# EAGLE board G22V3 (EAGLE 9.6.2)
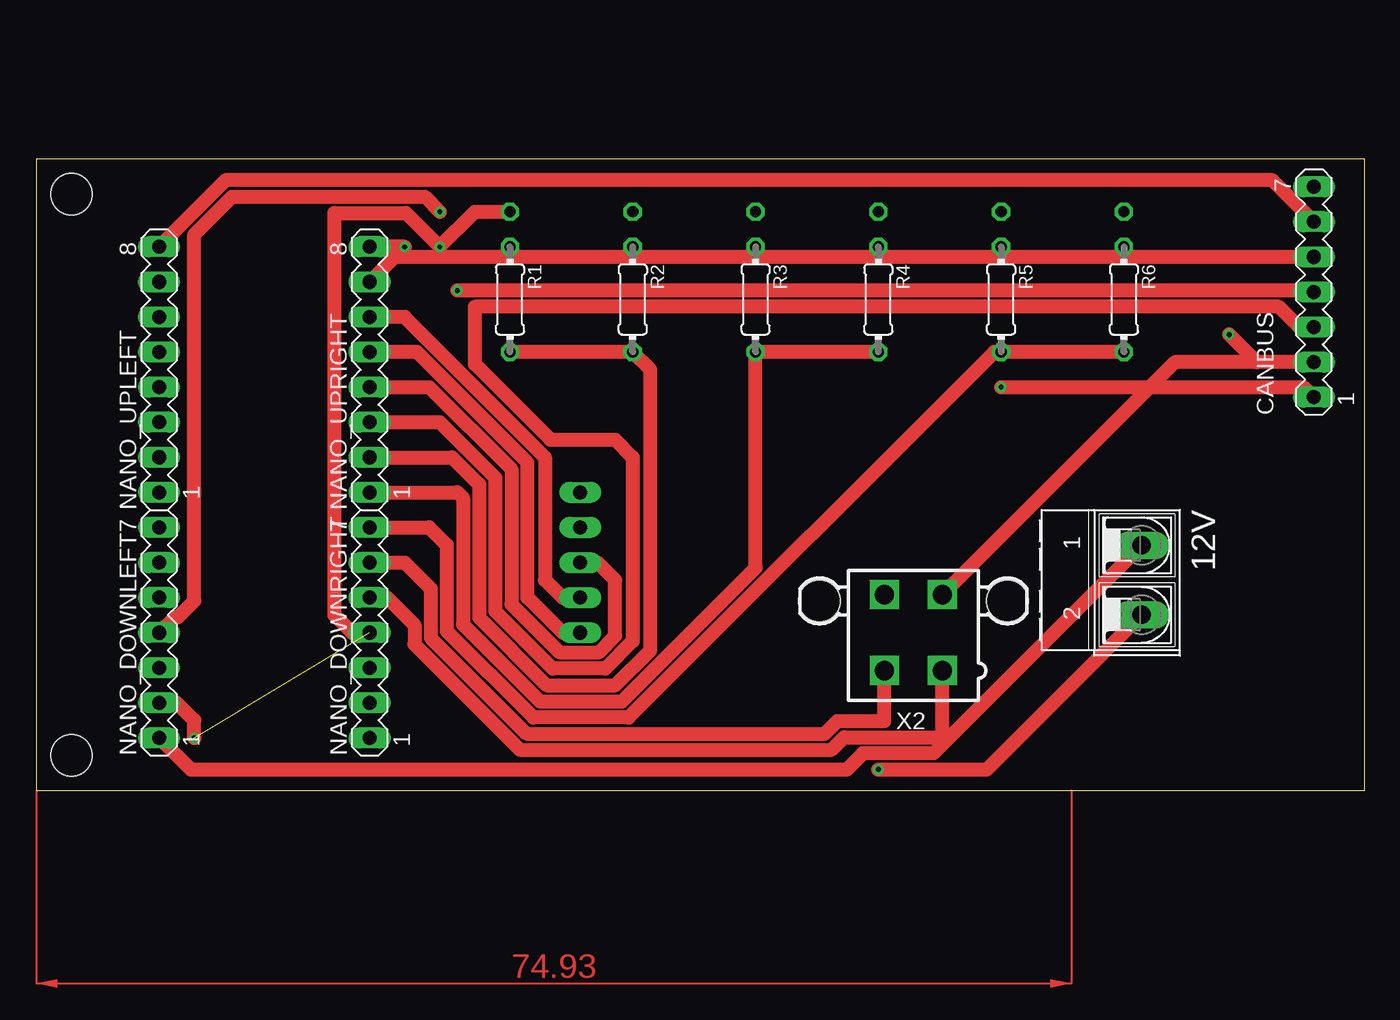
[diagram p0: board, top side]
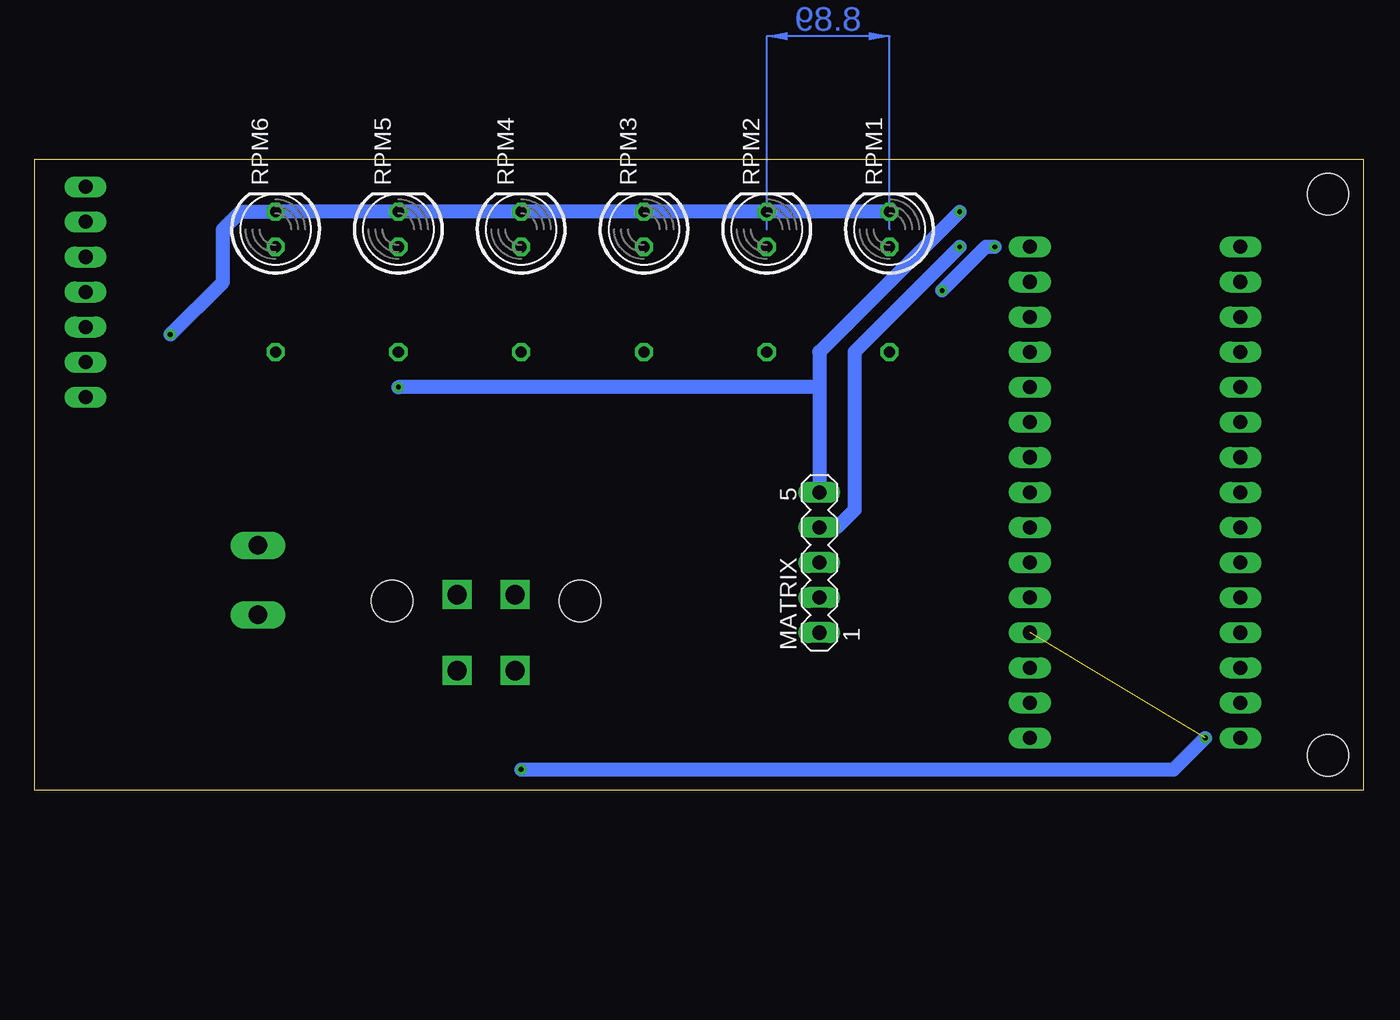
[diagram p1: board, bottom side, seen from below]

Size 96.19 x 45.71 mm. Coordinates in mm from the lower left corner, seen from the top.
Outline: 0,0 96.19,0 96.19,45.71 0,45.71 0,0
Copper layers (1*16): Top 0.035mm / dielectric 1.5mm / Bottom 0.035mm
Design rules "default": minimum track width 6mil, minimum drill 0.35mm, track to track 6mil, track to pad 6mil, pad to pad 6mil, via to via 6mil, smd to smd 6mil, copper to edge 40mil, drill to drill 6mil, minimum pad ring 10mil, minimum via ring 8mil, stop-mask expansion 4mil, vias tented up to drill 0mil, thermal gap 10mil
Holes 3 mm at 2.54,43.18 2.54,2.54 118.11,2.54 118.11,43.18

## Footprints (pad centres in the part's own frame; a part is rotated, then mirrored left to right if it is on the bottom)
AK500/2-H = drill 1.321 long: 1 -2.515,0; 2 2.515,0
MA07-1 = drill 1.016 long: 1 -7.62,0; 2 -5.08,0; 3 -2.54,0; 4 0,0; 5 2.54,0; 6 5.08,0; 7 7.62,0
MA05-1 = drill 1.016 long: 1 -5.08,0; 2 -2.54,0; 3 0,0; 4 2.54,0; 5 5.08,0
MA08-1 = drill 1.016 long: 1 -8.89,0; 2 -6.35,0; 3 -3.81,0; 4 -1.27,0; 5 1.27,0; 6 3.81,0; 7 6.35,0; 8 8.89,0
0204/7 = drill 0.813 octagon: 1 -3.81,0; 2 3.81,0
LED5MM = drill 0.813 octagon: A -1.27,0; K 1.27,0
5566-4 = drill 1.4 square: 1 2.1,-2.75; 2 -2.1,-2.75; 3 2.1,2.75; 4 -2.1,2.75 | hole 3: 6.8,2.29; -6.8,2.29

## Placement (x,y rotation side)
12V  [AK500/2-H]  80.01,15.24 270 top
CANBUS  [MA07-1]  92.49,36.1 90 top
MATRIX  [MA05-1]  39.37,16.51 90 bottom
NANO_DOWNLEFT  [MA07-1]  8.89,11.43 90 top
NANO_DOWNRIGHT  [MA07-1]  24.13,11.43 90 top
NANO_UPLEFT  [MA08-1]  8.89,30.48 90 top
NANO_UPRIGHT  [MA08-1]  24.13,30.48 90 top
R1  [0204/7]  34.29,35.56 270 top
R2  [0204/7]  43.18,35.56 270 top
R3  [0204/7]  52.07,35.56 270 top
R4  [0204/7]  60.96,35.56 270 top
R5  [0204/7]  69.85,35.56 270 top
R6  [0204/7]  78.74,35.56 270 top
RPM1  [LED5MM]  34.29,40.64 90 bottom
RPM2  [LED5MM]  43.18,40.64 90 bottom
RPM3  [LED5MM]  52.07,40.64 90 bottom
RPM4  [LED5MM]  60.96,40.64 90 bottom
RPM5  [LED5MM]  69.85,40.64 90 bottom
RPM6  [LED5MM]  78.74,40.64 90 bottom
X2  5566-4  [5566-4]  63.5,11.43 0 top

## Library data of the parts
12V = con-ptr500; OC_FARNELL: unknown; OC_NEWARK: unknown
CANBUS MATRIX NANO_DOWNLEFT NANO_DOWNRIGHT NANO_UPLEFT NANO_UPRIGHT = con-lstb; OC_FARNELL: unknown; OC_NEWARK: unknown
R1-R6 = rcl; SPICEPREFIX: R
RPM1-RPM6 = led
X2 = con-molex; MF: MOLEX; OC_FARNELL: unknown; OC_NEWARK: unknown

## Nets
A7: NANO_DOWNLEFT.5
CLK: MATRIX.1 NANO_UPRIGHT.5
CS_CAN: CANBUS.3 NANO_UPRIGHT.3
CS_MATRIX: MATRIX.2 NANO_UPRIGHT.6
D2: NANO_DOWNRIGHT.5 X2.1
D3: NANO_DOWNRIGHT.6 X2.2
D4: NANO_DOWNRIGHT.7 R5.2 R6.2
D5: NANO_UPRIGHT.1 R3.2 R4.2
D6: NANO_UPRIGHT.2 R1.2 R2.2
DIN: MATRIX.3 NANO_UPRIGHT.4
GND: 12V.2 CANBUS.2 MATRIX.4 NANO_DOWNLEFT.2 NANO_DOWNRIGHT.4 RPM1.K RPM2.K RPM3.K RPM4.K RPM5.K RPM6.K X2.3
MISO: CANBUS.4 NANO_UPRIGHT.8
MOSI: CANBUS.5 NANO_UPRIGHT.7
N$6: X2.4
N$13: NANO_DOWNRIGHT.3
N$14: NANO_DOWNRIGHT.2
N$15: NANO_DOWNRIGHT.1
N$17: NANO_UPLEFT.7
N$18: NANO_UPLEFT.6
N$19: NANO_UPLEFT.5
N$20: NANO_UPLEFT.4
N$21: NANO_UPLEFT.3
N$22: NANO_UPLEFT.2
N$23: NANO_UPLEFT.1
N$24: NANO_DOWNLEFT.7
N$25: NANO_DOWNLEFT.6
N$28: NANO_DOWNLEFT.3
N$29: R1.1 RPM1.A
N$30: R2.1 RPM2.A
N$31: R3.1 RPM3.A
N$32: R4.1 RPM4.A
N$33: R5.1 RPM5.A
N$34: R6.1 RPM6.A
SCK: CANBUS.6 NANO_UPLEFT.8
VCC: CANBUS.1 MATRIX.5 NANO_DOWNLEFT.4
VIN: 12V.1 NANO_DOWNLEFT.1

## Tracks (layer width: path | path; a pad name or v marks a point on that pad's centre or on a via)
CLK
  Top 1.016: 25.4,31.75 NANO_UPRIGHT.5 27.56,31.75 35.56,23.75 35.56,13.97 38.1,11.43 MATRIX.1
CS_CAN
  Top 1.016: NANO_UPRIGHT.3 29.21,26.67 33.22,22.66 33.22,13 37.39,8.84 41.2,8.84 43.18,10.81 43.18,24.13 41.91,25.4 37.21,25.4 31.75,30.86 31.75,35.03 89.95,35.03 91.42,33.56 CANBUS.3
CS_MATRIX
  Top 1.016: NANO_UPRIGHT.6 26.67,34.29 36.83,24.13 36.83,15.24 38.1,13.97 MATRIX.2
D2
  Top 1.016: NANO_DOWNRIGHT.5 25.4,13.97 27.38,11.99 27.38,10.58 35.02,2.95 57.56,2.95 58.47,3.86 65.6,3.86 X2.1
D3
  Top 1.016: NANO_DOWNRIGHT.6 26.67,16.51 28.55,14.63 28.55,11.07 35.5,4.12 57.07,4.12 57.99,5.03 61.4,5.03 X2.2
D4
  Top 1.016: R6.2 R5.2 69.34,31.75 42.88,5.28 35.98,5.28 29.72,11.55 29.72,17.78 28.45,19.05 NANO_DOWNRIGHT.7
D5
  Top 1.016: R4.2 R3.2 52.07,16.13 42.39,6.45 36.47,6.45 30.89,12.03 30.89,21.18 30.48,21.59 NANO_UPRIGHT.1
D6
  Top 1.016: R1.2 R2.2 44.45,30.48 44.45,10.16 41.91,7.62 36.95,7.62 32.05,12.52 32.05,22.17 30.1,24.13 NANO_UPRIGHT.2 25.4,24.13
DIN
  Top 1.016: MATRIX.3 40.64,16.51 41.91,15.24 41.91,11.2 40.72,10.01 37.87,10.01 34.39,13.49 34.39,23.26 28.45,29.21 NANO_UPRIGHT.4
GND  (via drill 0.35)  (1 unrouted)
  Top 1.016: 12V.2 68.81,1.52 v60.96,1.52 | v11.43,3.81 11.43,5.08 10.16,6.35 NANO_DOWNLEFT.2 | NANO_DOWNRIGHT.4 22.86,11.43 21.59,12.7 21.59,41.82 26.76,41.82 v29.21,39.37 31.75,41.91 RPM1.K | v86.36,33.02 88.36,31.02 CANBUS.2 82.44,31.02 X2.3
  Bottom 1.016: v60.96,1.52 13.72,1.52 v11.43,3.81 | RPM1.K RPM2.K RPM3.K RPM4.K RPM5.K RPM6.K 81.28,41.91 82.55,40.64 82.55,36.83 v86.36,33.02 | v29.21,39.37 36.83,31.75 36.83,20.32 38.1,19.05 MATRIX.4
MISO  (via drill 0.35)
  Top 1.016: CANBUS.4 92.49,36.2 v30.48,36.2 | v26.67,39.37 NANO_UPRIGHT.8
  Bottom 1.016: v30.48,36.2 27.31,39.37 v26.67,39.37
MOSI
  Top 1.016: CANBUS.5 25.94,38.64 NANO_UPRIGHT.7
SCK
  Top 1.016: CANBUS.6 89.48,44.19 13.71,44.19 NANO_UPLEFT.8
VCC  (via drill 0.35)
  Top 1.016: NANO_DOWNLEFT.4 10.01,12.55 10.24,12.55 11.43,13.74 11.43,40.26 14.16,42.99 28.13,42.99 v29.21,41.91 | CANBUS.1 91.76,29.21 v69.85,29.21
  Bottom 1.016: 39.37,29.21 MATRIX.5 | 39.37,29.21 v69.85,29.21 | v29.21,41.91 39.37,31.75 39.37,29.21
VIN
  Top 1.016: NANO_DOWNLEFT.1 11.18,1.52 58.67,1.52 59.84,2.69 64.95,2.69 12V.1
(copper drawn outside any net)
  shapes: Bottom area x1, Top area x1